# EAGLE board red_green_LEDs (EAGLE 9.6.2)
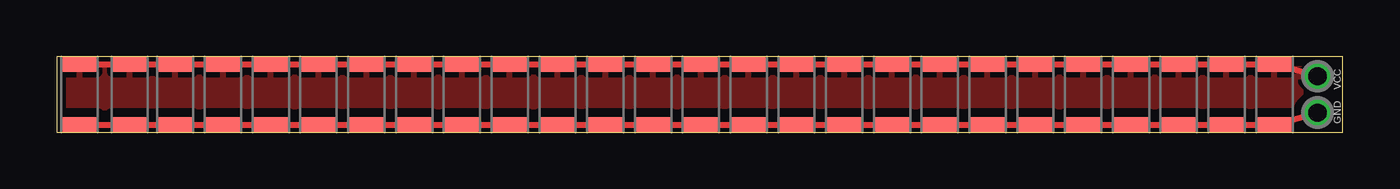
[diagram p0: board, top side]
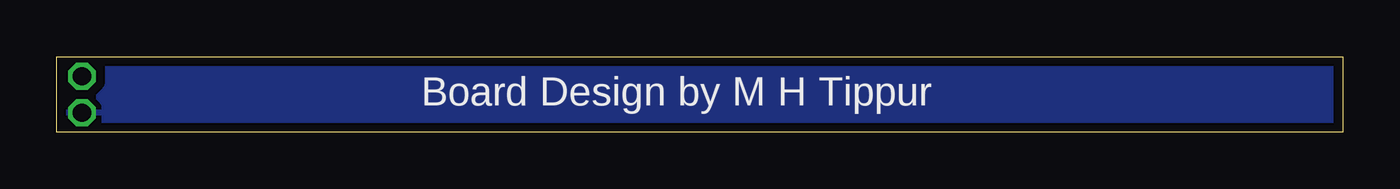
[diagram p1: board, bottom side, seen from below]

Size 56.5 x 3.3 mm. Coordinates in mm from the lower left corner, seen from the top.
Outline: 0,0 56.5,0 56.5,3.3 0,3.3 0,0
Copper layers (1*16): Top 0.035559375mm / dielectric 1.6mm / Bottom 0.035559375mm
Design rules "oshpark-2layer": minimum track width 6mil, minimum drill 10mil, track to track 6mil, track to pad 6mil, pad to pad 6mil, via to via 6mil, smd to smd 6mil, copper to edge 15mil, drill to drill 6mil, minimum pad ring 5mil, minimum via ring 5mil, stop-mask expansion 2.5mil, vias tented up to drill 0mil, thermal gap 10mil

## Footprints (pad centres in the part's own frame; a part is rotated, then mirrored left to right if it is on the bottom)
1,0/0,75 = drill 0.8 pad 1.016 octagon: 1 0,0
APT3216ZGC = smd 0.65 x 1.5: 1 -1.325,0; 2 1.325,0

## Placement (x,y rotation side)
GND  1,0/0,75  [1,0/0,75]  55.4,0.85 0 top
LED1  APT3216ZGC  [APT3216ZGC]  1,1.65 90 top
LED2  APT3216ZGC  [APT3216ZGC]  3.2,1.65 90 top
LED3  APT3216ZGC  [APT3216ZGC]  5.2,1.65 90 top
LED4  APT3216ZGC  [APT3216ZGC]  7.3,1.65 90 top
LED5  APT3216ZGC  [APT3216ZGC]  9.4,1.65 90 top
LED6  APT3216ZGC  [APT3216ZGC]  11.5,1.65 90 top
LED7  APT3216ZGC  [APT3216ZGC]  13.6,1.65 90 top
LED8  APT3216ZGC  [APT3216ZGC]  15.7,1.65 90 top
LED9  APT3216ZGC  [APT3216ZGC]  17.8,1.65 90 top
LED10  APT3216ZGC  [APT3216ZGC]  19.9,1.65 90 top
LED11  APT3216ZGC  [APT3216ZGC]  22,1.65 90 top
LED12  APT3216ZGC  [APT3216ZGC]  24.1,1.65 90 top
LED13  APT3216ZGC  [APT3216ZGC]  26.2,1.65 90 top
LED14  APT3216ZGC  [APT3216ZGC]  28.3,1.65 90 top
LED15  APT3216ZGC  [APT3216ZGC]  30.4,1.65 90 top
LED16  APT3216ZGC  [APT3216ZGC]  32.5,1.65 90 top
LED17  APT3216ZGC  [APT3216ZGC]  34.6,1.65 90 top
LED18  APT3216ZGC  [APT3216ZGC]  36.7,1.65 90 top
LED19  APT3216ZGC  [APT3216ZGC]  38.8,1.65 90 top
LED20  APT3216ZGC  [APT3216ZGC]  40.9,1.65 90 top
LED21  APT3216ZGC  [APT3216ZGC]  43,1.65 90 top
LED22  APT3216ZGC  [APT3216ZGC]  45.1,1.65 90 top
LED23  APT3216ZGC  [APT3216ZGC]  47.2,1.65 90 top
LED24  APT3216ZGC  [APT3216ZGC]  49.3,1.65 90 top
LED25  APT3216ZGC  [APT3216ZGC]  51.4,1.65 90 top
LED26  APT3216ZGC  [APT3216ZGC]  53.5,1.65 90 top
VCC  1,0/0,75  [1,0/0,75]  55.4,2.45 0 top

## Library data of the parts
GND VCC = BoardConnectorPin_Straight
LED1-LED26 = APT3216ZGC; DESCRIPTION: Green 525nm LED Indication - Discrete 3.3V 1206 (3216 Metric); HEIGHT: 0.95mm; MANUFACTURER_NAME: Kingbright; MANUFACTURER_PART_NUMBER: APT3216ZGC; MOUSER_PART_NUMBER: 604-APT3216ZGC; MOUSER_PRICE-STOCK: https://www.mouser.co.uk/ProductDetail/Kingbright/APT3216ZGC?qs=f499HRGa1RlpA1toCLDk0g%3D%3D

## Nets
GND: GND.1 LED1.1 LED2.1 LED3.1 LED4.1 LED5.1 LED6.1 LED7.1 LED8.1 LED9.1 LED10.1 LED11.1 LED12.1 LED13.1 LED14.1 LED15.1 LED16.1 LED17.1 LED18.1 LED19.1 LED20.1 LED21.1 LED22.1 LED23.1 LED24.1 LED25.1 LED26.1
PWR: LED1.2 LED2.2 LED3.2 LED4.2 LED5.2 LED6.2 LED7.2 LED8.2 LED9.2 LED10.2 LED11.2 LED12.2 LED13.2 LED14.2 LED15.2 LED16.2 LED17.2 LED18.2 LED19.2 LED20.2 LED21.2 LED22.2 LED23.2 LED24.2 LED25.2 LED26.2 VCC.1

## Tracks (layer width: path | path; a pad name or v marks a point on that pad's centre or on a via)
GND
  Top 0.254: GND.1 LED26.1 LED25.1 LED24.1 LED23.1 LED22.1 LED21.1 LED20.1 LED19.1 LED18.1 LED17.1 LED16.1 LED15.1 LED14.1 LED13.1 LED12.1 LED11.1 LED10.1 LED9.1 LED8.1 LED7.1 LED6.1 LED5.1 LED4.1 LED3.1 LED2.1 LED1.1
  pour Bottom (isolate 0.406): -0.5,-0.35 -0.5,3.65 57,3.65 57,-0.35
PWR
  Top 0.254: LED1.2 LED2.2 LED3.2 LED4.2 LED5.2 LED6.2 LED7.2 LED8.2 LED9.2 LED10.2 LED11.2 LED12.2 LED13.2 LED14.2 LED15.2 LED16.2 LED17.2 LED18.2 LED19.2 LED20.2 LED21.2 LED22.2 LED23.2 LED24.2 LED25.2 LED26.2 VCC.1
  pour Top (isolate 0.406): -0.5,-0.35 -0.5,3.65 57,3.65 57,-0.35

## Text on the board
bNames: Board Design by M H Tippur